# Altium PCB MB1455.PcbDoc (part 2 of 2)
Units mm, origin at the board's own origin, x right, y up, seen from the top; angles counter-clockwise.
Board outline 18.54 x 50.29 mm, 4 copper layers (Top Layer, Inner 1, Inner 2, Bottom Layer), stack 1.577 mm thick; 92 components, 84 nets, 350 pads, 195 vias.
Unrouted connection lines stored in the file: 7.
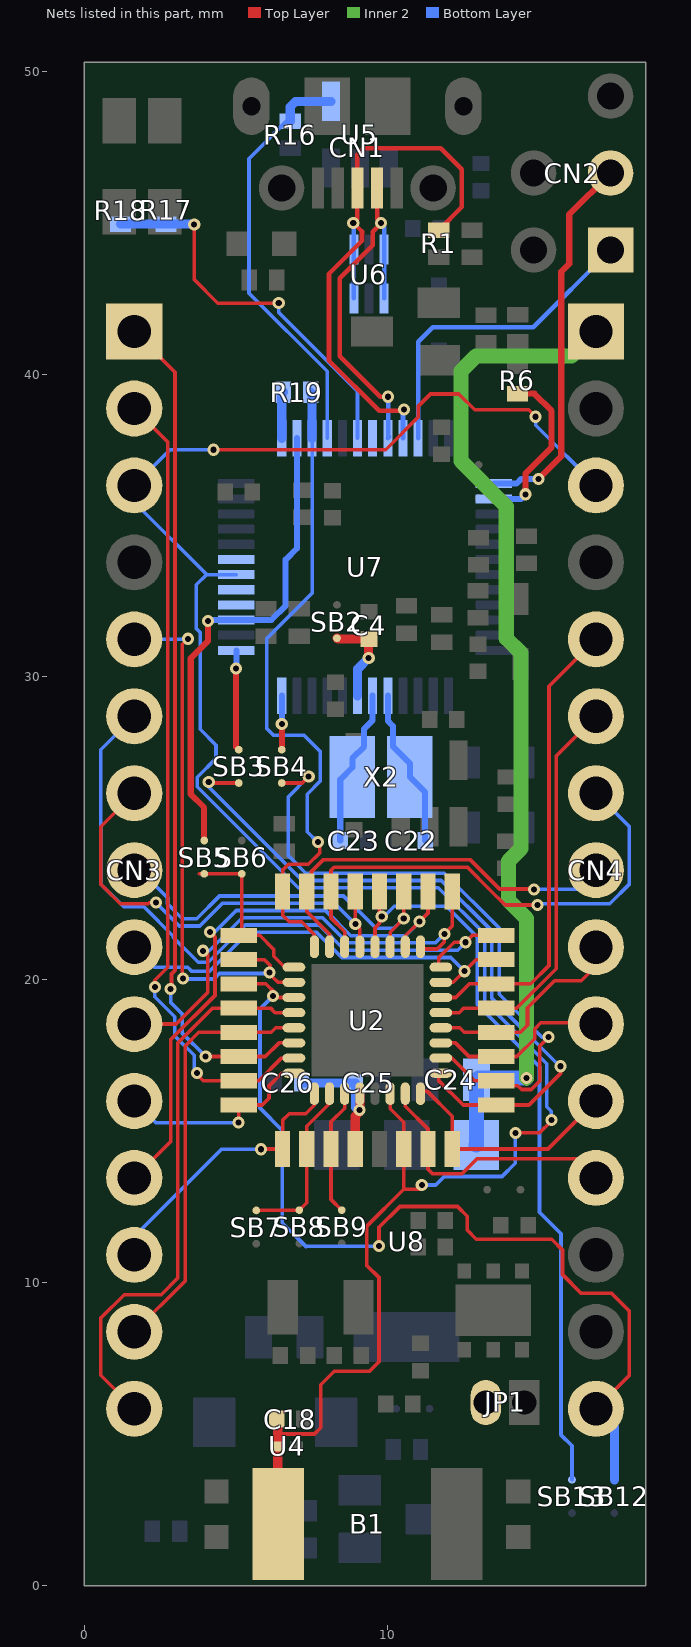
[diagram p4: the nets of this part, all layers, seen from the top]

## Via types
v1: diameter 0.4, hole 0.2, Top Layer to Bottom Layer, 195 vias

## Nets (pads, with @x,y where several pads share a name; then routed paths per layer and width w, separated by ;. In a path a pad name is that pad's centre, name@x,y a point inside that pad or via, vN(x,y) a via of type N, cw(c..) or ccw(c..) an arc to the next point about the centre after c; other vN are vias at no path point) (continued)
NetSB3_1: SB3.1 U2.9 | length 23.2
  Top Layer w0.12: v1(4.11,26.53) 4.14,26.5 SB3.1@5.1,26.5 ; U2.9@11.697,16.93 11.697,16.919 11.697,16.679 12.507,15.869 U2.9@13.597,15.869 14.679,15.869 15.72,16.91 v1(15.72,17.15)
  Bottom Layer w0.12: v1(4.11,26.53) 4.11,26.37 7.2,23.28 11.789,23.28 13.457,21.611 13.457,19.388 15.696,17.15 v1(15.72,17.15)
NetSB3_2: SB3.2 U7.13 | length 3.3
  Top Layer w0.2: v1(5.01,30.28) 5.01,27.69 SB3.2@5.1,27.6
  Bottom Layer w0.2: v1(5.01,30.28) 5.021,30.291 U7.13@5.021,30.88
NetSB4_1: SB4.1 U2.10 | length 21.7
  Top Layer w0.12: SB4.1@6.521,26.5 7.2,26.5 7.41,26.71 v1(7.41,26.72) ; U2.10@11.697,17.419 12.133,17.419 12.883,16.669 U2.10@13.597,16.669 13.756,16.51 14.313,16.51 14.443,16.38 14.757,16.38 15.04,16.663 15.04,17.82 v1(15.33,18.11)
  Bottom Layer w0.12: v1(7.41,26.72) 6.73,26.04 6.73,24.105 7.315,23.52 11.888,23.52 13.697,21.711 13.697,19.522 15.109,18.11 v1(15.33,18.11)
NetSB4_2: SB4.2 U7.12 | length 1.8
  Top Layer w0.2: SB4.2@6.521,27.6 v1(6.521,28.45) v1@6.521,28.49
  Bottom Layer w0.2: v1(6.521,28.45) U7.12@6.521,29.38
NetSB5_2: SB5.2 SB6.2 U2.25 | length 5.9
  Top Layer w0.12: 3.8,23.5 SB6.2@5.2,23.5 5.2,21.572 U2.25@5.097,21.469 5.796,21.469 6.26,21.005 6.26,20.78 6.621,20.419 U2.25@6.997,20.419
NetSB7_2: SB7.2 SB8.2 U2.2 | length 5.7
  Top Layer w0.12: SB7.2@5.68,12.39 5.69,12.4 SB8.2@7.1,12.4 7.347,12.647 U2.2@7.347,14.419 7.347,15.167 8.09,15.91 U2.2@8.09,16.31
NetSB9_2: SB9.2 U2.3 | length 4.3
  Top Layer w0.12: SB9.2@8.5,12.4 8.147,12.753 U2.3@8.147,14.419 8.147,15.314 8.597,15.764 U2.3@8.597,16.319
OSC_IN: C22.2 U7.5 X2.1 | length 5.3
  Bottom Layer w0.2: U7.5@10.021,29.38 10.021,28.549 10.19,28.38 10.19,27.71 10.75,27.15 X2.1@10.75,26.7 11.25,26.2 C22.2@11.25,24.6
OSC_OUT: C23.2 U7.6 X2.2 | length 5.2
  Bottom Layer w0.2: C23.2@8.45,24.6 8.45,26.61 8.85,27.01 8.85,27.31 9.24,27.7 9.24,28.289 9.521,28.57 U7.6@9.521,29.38
PA0: CN4.12 U2.7 | length 9
  Top Layer w0.12: U2.7@10.597,16.319 10.597,15.831 11.347,15.081 U2.7@11.347,14.419 11.347,13.746 11.493,13.6 12.47,13.6 12.96,14.09 16.263,14.09 CN4.12@16.891,13.462
PA1: CN4.11 U2.8 | length 7.9
  Top Layer w0.12: U2.8@11.097,16.319 11.33,16.319 12.147,15.501 U2.8@12.147,14.419 15.308,14.419 CN4.11@16.891,16.002
PA4: CN4.10 U2.11 | length 6
  Top Layer w0.12: U2.11@11.697,17.919 12.252,17.919 12.702,17.469 U2.11@13.597,17.469 14.279,17.469 14.87,18.06 14.87,18.38 15.071,18.581 16.852,18.581 CN4.10@16.891,18.542
PA5: CN4.9 U2.12 | length 7.1
  Top Layer w0.12: U2.12@11.697,18.419 12.394,18.419 12.544,18.269 U2.12@13.597,18.269 14.4,18.269 14.63,18.499 14.63,19.079 15.526,19.975 16.405,19.975 16.891,20.461 CN4.9@16.891,21.082
PA6: CN4.6 U2.13 | length 13.4
  Top Layer w0.12: U2.13@11.697,18.919 12.375,18.919 12.525,19.069 U2.13@13.597,19.069 14.281,19.069 15.58,20.368 15.58,27.391 CN4.6@16.891,28.702
PA7: CN4.5 U2.14 | length 15.5
  Top Layer w0.12: U2.14@11.697,19.419 12.268,19.419 12.718,19.869 U2.14@13.597,19.869 14.737,19.869 15.34,20.472 15.34,29.691 CN4.5@16.891,31.242
PA8: CN3.12 U2.18 | length 19.3
  Top Layer w0.12: CN3.12@1.651,13.462 2.85,14.661 2.85,18.019 4.317,19.487 4.317,21.413 v1(4.15,21.58) ; U2.18@10.597,21.019 U2.18@10.597,21.094 10.597,21.455 v1(11.071,21.929) 11.347,22.205 U2.18@11.347,22.919
  Bottom Layer w0.12: v1(4.15,21.58) 4.308,21.58 5.018,22.29 7.967,22.29 8.797,21.46 10.602,21.46 v1(11.071,21.929)
PA9: CN3.8 U2.19 | length 12.8
  Top Layer w0.12: U2.19@10.097,21.019 U2.19@10.097,21.094 10.097,21.574 v1(10.547,22.024) U2.19@10.547,22.919
  Bottom Layer w0.12: CN3.8@1.651,23.622 CN3.8@1.835,23.622 ; CN3.8@2.008,23.622 CN3.8@1.835,23.622 ; v1@10.53,22.01 10.22,21.7 9.632,21.7 8.562,22.77 4.463,22.77 3.713,22.02 3.239,22.02 2.75,22.509 2.75,22.707 CN3.8@1.835,23.622
PA10: CN3.7 U2.21 | length 15.1
  Top Layer w0.12: CN3.7@1.651,26.162 0.546,25.057 0.546,23.164 1.193,22.517 2.109,22.517 2.142,22.55 v1(2.37,22.55) v1@2.43,22.55 ; U2.21@8.947,22.919 v1(8.947,21.847) 9.097,21.697 U2.21@9.097,21.094 U2.21@9.097,21.019
  Bottom Layer w0.12: v1(2.37,22.55) 3.14,21.78 3.813,21.78 4.563,22.53 8.264,22.53 v1(8.947,21.847)
PA11: CN4.7 U2.22 | length 17
  Top Layer w0.12: U2.22@8.597,21.019 8.597,21.59 8.147,22.04 U2.22@8.147,22.919 8.147,23.62 8.247,23.72 12.65,23.72 13.391,22.98 ; 13.391,22.979 13.9,22.47 v1(14.96,22.47)
  Bottom Layer w0.12: v1(14.96,22.47) 14.96,22.5 14.977,22.517 17.349,22.517 17.996,23.164 17.996,25.057 CN4.7@16.891,26.162
PA12: CN4.8 U2.23 | length 13.1
  Top Layer w0.12: U2.23@8.097,21.019 8.097,21.507 7.347,22.257 U2.23@7.347,22.919 7.5,23.072 7.5,23.58 7.88,23.96 12.75,23.96 13.71,23 14.84,23 v1(14.85,22.99)
  Bottom Layer w0.12: v1(14.85,22.99) 16.259,22.99 CN4.8@16.891,23.622
PA15: CN3.5 U2.26 | length 18.4
  Top Layer w0.12: v1(3.26,20.04) 3.236,20.064 3.236,31.076 v1(3.42,31.26) ; U2.26@5.097,20.669 5.947,20.669 6.13,20.486 6.13,20.27 v1(6.11,20.25) ; v1@6.21,20.27 6.21,20.104 6.395,19.919 U2.26@6.997,19.919
  Bottom Layer w0.12: CN3.5@1.651,31.242 3.402,31.242 v1(3.42,31.26) ; v1(3.26,20.04) 3.27,20.03 4.28,20.03 4.46,20.21 6.07,20.21 v1(6.11,20.25)
PB0: CN3.9 U2.15 | length 14.5
  Top Layer w0.12: U2.15@11.697,19.919 12.185,19.919 v1(12.553,20.287) 12.935,20.669 U2.15@13.597,20.669
  Bottom Layer w0.12: CN3.9@1.651,21.082 2.313,20.42 3.417,20.42 3.557,20.28 4.129,20.28 5.419,21.57 7.669,21.57 8.499,20.74 12.1,20.74 v1(12.553,20.287)
PB1: CN3.6 U2.16 | length 22.6
  Top Layer w0.12: U2.16@11.697,20.419 11.697,20.728 12.211,21.242 v1(12.588,21.242) 12.815,21.469 U2.16@13.597,21.469
  Bottom Layer w0.12: CN3.6@1.651,28.702 0.546,27.597 0.546,23.164 1.3,22.41 1.97,22.41 2.94,21.44 2.94,21.403 3.763,20.58 4.089,20.58 5.319,21.81 7.768,21.81 8.598,20.98 12.326,20.98 v1(12.588,21.242)
PB2: CN3.10 U2.17 | length 15.9
  Top Layer w0.12: CN3.10@1.651,18.542 3.033,18.542 4.077,19.586 4.077,20.863 3.98,20.96 v1(3.92,20.96) ; U2.17@11.097,21.019 11.649,21.019 11.89,21.26 v1(11.89,21.52) 12.147,21.777 U2.17@12.147,22.919
  Bottom Layer w0.12: v1(3.92,20.96) 4.13,20.96 5.22,22.05 7.868,22.05 8.698,21.22 11.59,21.22 v1(11.89,21.52)
PB3: CN4.15 SB12.1 U2.27 | length 31.2
  Top Layer w0.12: U2.27@5.097,19.869 5.992,19.869 6.311,19.55 v1(6.23,19.47) ; 6.442,19.419 U2.27@6.922,19.419 U2.27@6.997,19.419 ; v1(9.73,11.21) 9.73,11.83 10.42,12.52 12.32,12.52 12.64,12.2 12.64,11.743 12.943,11.44 15.43,11.44 15.786,11.084 15.786,10.274 16.41,9.65 17.41,9.65 17.996,9.064 17.996,6.947 CN4.15@16.891,5.842
  Bottom Layer w0.12: v1@6.2,19.5 v1(6.23,19.47) 5.8,19.04 5.8,15.769 6.54,15.029 6.54,11.98 7.32,11.2 7.33,11.21 v1(9.73,11.21)
  Bottom Layer w0.3: CN4.15@16.891,5.842 17.5,5.233 SB12.1@17.5,3.5
PB4: CN3.15 U2.28 | length 18.8
  Top Layer w0.12: CN3.15@1.651,5.842 0.546,6.947 0.546,8.84 1.316,9.61 2.54,9.61 3.09,10.16 3.09,17.92 4.239,19.069 U2.28@5.097,19.069 6.15,19.069 6.3,18.919 U2.28@6.997,18.919
PB5: CN3.14 U2.29 | length 14
  Top Layer w0.12: CN3.14@1.651,8.382 3.33,10.061 3.33,17.821 3.778,18.269 U2.29@5.097,18.269 6.169,18.269 6.319,18.419 U2.29@6.997,18.419
PB6: CN3.1 U2.30 | length 28.2
  Top Layer w0.12: CN3.1@1.651,41.402 2.996,40.057 2.996,20.313 2.88,20.197 2.88,19.73 v1(2.85,19.7) ; v1(4.01,17.469) U2.30@5.097,17.469 5.976,17.469 6.426,17.919 U2.30@6.997,17.919
  Bottom Layer w0.12: v1(2.85,19.7) 2.85,19.259 3.23,18.879 3.23,18.249 v1(4.01,17.469)
PB7: CN3.2 U2.31 | length 26.9
  Top Layer w0.12: CN3.2@1.651,38.862 2.756,37.757 2.756,20.413 2.33,19.987 v1(2.33,19.76) ; v1(3.72,16.93) 3.72,16.88 3.931,16.669 U2.31@5.097,16.669 5.759,16.669 6.509,17.419 U2.31@6.997,17.419
  Bottom Layer w0.12: v1(2.33,19.76) 2.33,19.44 2.99,18.78 2.99,18.15 3.63,17.51 3.63,17.02 v1(3.72,16.93)
PB8: CN3.11 U2.32 | length 6.9
  Top Layer w0.12: v1(5.097,15.287) U2.32@5.097,15.869 5.879,15.869 6.1,16.09 6.1,16.5 6.519,16.919 U2.32@6.997,16.919
  Bottom Layer w0.12: CN3.11@1.651,16.002 2.366,15.287 v1(5.097,15.287)
PB9: CN3.13 U2.1 | length 9.4
  Top Layer w0.12: v1(5.831,14.41) 5.84,14.419 U2.1@6.547,14.419 6.547,15.363 6.766,15.582 7.316,15.582 7.597,15.863 U2.1@7.597,16.319
  Bottom Layer w0.12: CN3.13@1.651,10.922 1.651,11.531 4.53,14.41 v1(5.831,14.41)
PC6: SB13.1 U2.20 | length 25.1
  Top Layer w0.12: U2.20@9.597,21.019 9.597,21.716 9.747,21.866 v1@9.747,22.03 ; U2.20@9.747,22.919 v1@9.747,22.03 ; v1(9.82,22.09) 9.76,22.03 v1@9.747,22.03
  Bottom Layer w0.12: v1(9.82,22.09) 9.82,22.02 10.23,22.43 11.96,22.43 12.977,21.413 12.977,19.189 15.03,17.137 15.03,12.33 15.74,11.62 15.74,4.98 16.1,4.62 SB13.1@16.1,3.5
PWR_ENn: R16.1 U5.4 U7.28 | length 14.1
  Bottom Layer w0.12: R16.1@6.8,48.35 6.68,48.35 5.44,47.11 5.44,42.67 8.021,40.089 U7.28@8.021,37.88
  Bottom Layer w0.3: R16.1@6.8,48.35 6.8,48.82 6.98,49 U5.4@8.15,49
STLK_LED: R17.1 R18.1 U7.30 | length 12.9
  Top Layer w0.12: v1(3.63,44.94) 3.63,43.12 4.41,42.34 v1(6.42,42.34)
  Bottom Layer w0.12: v1(6.42,42.34) 6.42,42.029 9.021,39.428 U7.30@9.021,37.88
  Bottom Layer w0.3: R18.1@1.2,44.95 R17.1@2.7,44.95 3.62,44.95 v1(3.63,44.94)
STLK_RST: C4.2 SB2.2 U7.7 | length 3.1
  Top Layer w0.3: SB2.2@8.343,31.28 8.372,31.25 C4.2@9.4,31.25 9.39,31.24 v1(9.39,30.63)
  Bottom Layer w0.3: U7.7@9.021,29.38 9.021,30.261 v1(9.39,30.63)
STLK_SWCLK: CN2.3 U7.37 | length 12.6
  Top Layer w0.2: v1(15,36.54) 15.746,37.286 15.746,43.376 16.01,43.64 16.01,45.271 CN2.3@17.374,46.634
  Bottom Layer w0.2: U7.37@13.521,36.38 14.27,36.38 14.43,36.54 v1(15,36.54)
STLK_SWDIO: CN2.1 U7.34 | length 10.8
  Bottom Layer w0.15: U7.34@11.021,37.88 11.021,41.061 11.5,41.54 14.819,41.54 CN2.1@17.374,44.094
STLK_USB_D_N: CN1.2 U6.1 U6.6 U7.32 | length 12
  Top Layer w0.152: CN1.2@9.667,46.142 9.667,45.103 v1@9.75,45.02 ; v1@9.78,44.953 9.52,44.692 9.52,44.254 8.432,43.167 8.432,40.586 9.768,39.25 v1(10.03,39.25)
  Bottom Layer w0.152: U6.1@9.9,42.495 U6.6@9.9,44.105 v1@9.9,44.85 ; U7.32@10.021,37.88 10.07,37.929 10.03,37.969 v1(10.03,39.25)
  other v1: 9.8,44.99
STLK_USB_D_P: CN1.3 R1.1 U6.3 U6.4 U7.33 | length 20.2
  Top Layer w0.152: v1(8.88,44.99) v1@8.904,44.99 ; v1@8.92,44.953 9.168,44.705 9.168,44.4 8.08,43.312 8.08,40.44 9.732,38.788 10.495,38.788 v1@10.547,38.84 ; v1@8.92,44.99 v1@8.904,44.99 ; v1@10.547,38.83 v1(10.55,38.83) ; R1.1@11.7,44.75 12.464,45.514 12.464,46.755 11.763,47.456 9.23,47.456 9.017,47.243 CN1.3@9.017,46.142 9.017,45.103 v1@8.904,44.99
  Bottom Layer w0.152: v1(8.88,44.99) 8.89,44.99 8.9,44.98 U6.4@8.9,44.105 U6.3@8.9,42.495 ; U7.33@10.521,37.88 10.521,38.83 v1(10.55,38.83)
T_JRST: U7.19
T_JTCK: SB5.1 U7.15 U7.26 | length 16.1
  Top Layer w0.2: SB5.1@3.96,24.6 3.96,25.69 3.516,26.134 3.516,30.616 4.08,31.18 v1(4.08,31.85)
  Bottom Layer w0.2: v1(4.08,31.85) 4.11,31.88 U7.15@5.021,31.88 6.18,31.88 6.65,32.35 6.65,33.87 7.021,34.241 U7.26@7.021,37.88
T_JTDI: U7.17
T_JTDO: U7.16
T_JTMS: R19.2 U2.24 U7.27 | length 22.3
  Top Layer w0.12: U2.24@7.597,21.019 7.597,21.497 7.178,21.916 6.768,21.916 6.547,22.137 U2.24@6.547,22.919 6.547,23.617 6.745,23.815 7.396,23.815 7.77,24.189 7.77,24.52 7.74,24.55 v1(7.72,24.55)
  Bottom Layer w0.12: U7.27@7.521,37.88 7.521,32.761 6.02,31.26 6.02,28.31 6.26,28.07 7.259,28.07 7.79,27.539 7.79,26.563 7.36,26.133 7.36,24.89 7.7,24.55 v1(7.72,24.55)
  Bottom Layer w0.3: R19.2@7.471,39.4 7.521,39.35 U7.27@7.521,37.88
T_NRST: B1.1 C18.2 CN3.3 CN4.3 U2.6 U4.1 U7.18 | length 74.2
  Top Layer w0.12: v1(4.27,37.5) 9.95,37.5 11.02,38.57 11.02,38.93 11.43,39.34 12.367,39.34 12.887,38.82 14.67,38.82 v1(14.9,38.59) ; 6.388,5.01 7.6,5.01 7.81,5.22 7.81,6.64 8.25,7.08 9.42,7.08 9.73,7.39 9.73,10.175 9.32,10.585 9.32,11.863 10.547,13.09 ; U2.6@10.097,16.319 U2.6@10.097,16.244 10.097,15.748 10.547,15.298 U2.6@10.547,14.419 10.547,13.09 ; v1(11.143,13.229) 11.143,13.153 11.08,13.09 10.547,13.09 ; v1(14.23,14.95) 15.032,14.95 15.42,15.338 v1(15.42,15.37)
  Top Layer w0.3: C18.2@6.35,5.5 6.388,5.462 6.388,5.01 U4.1@6.388,4.6 6.388,2.042 B1.1@6.397,2.032
  Bottom Layer w0.12: v1(4.27,37.5) 2.829,37.5 CN3.3@1.651,36.322 1.651,35.769 4.04,33.38 ; U7.18@5.021,33.38 4.04,33.38 ; v1(11.143,13.229) 11.599,13.229 11.88,13.51 13.79,13.51 14.23,13.95 v1(14.23,14.95) ; v1(14.9,38.59) 14.9,38.313 CN4.3@16.891,36.322 ; v1(15.42,15.37) 15.42,15.66 15.27,15.81 15.27,17.236 13.217,19.289 13.217,21.512 11.689,23.04 7.063,23.04 3.73,26.373 3.73,26.687 4.35,27.307 4.35,27.75 3.83,28.27 3.83,31.47 3.7,31.6 3.7,33.039 4.04,33.38
T_SWDIO_IN: R19.1 U7.25 | length 1.5
  Bottom Layer w0.3: U7.25@6.521,37.88 6.521,39.35 R19.1@6.571,39.4
T_SWO: U7.31
USB_RENUMn: R6.2 U7.38 | length 5.6
  Top Layer w0.2: R6.2@14.3,39.35 14.86,39.35 15.426,38.784 15.426,37.576 14.57,36.72 v1(14.57,36.03)
  Bottom Layer w0.2: U7.38@13.521,35.88 14.42,35.88 v1(14.57,36.03)
VDD: C25.2 C26.2 JP1.2 U2.4 | length 4.7
  Top Layer w0.3: U2.4@8.947,14.419 8.947,15.499 9.097,15.649 U2.4@9.097,16.319
  Bottom Layer w0.3: C26.2@7.172,16.6 C25.2@8.95,16.6 8.95,15.79 9.04,15.7 v1(9.09,15.7)
VIN: C24.2 CN4.1 U8.3 | length 33.4
  Inner 2 w0.5: v1(14.6,16.76) 14.6,22.024 14,22.624 14,23.92 14.42,24.34 14.42,30.79 13.93,31.28 13.93,35.63 12.434,37.126 12.434,40.1 12.934,40.6 16.089,40.6 CN4.1@16.891,41.402
  Bottom Layer w0.5: U8.3@12.943,14.554 12.95,14.562 C24.2@12.95,16.7 13.01,16.76 v1(14.6,16.76)
pads on no net: CN2.5 U3.3 U3.5 U7.4 U7.11 U7.14 U7.21 U7.22 U7.40 U7.41 U7.42 U7.43 U7.45 U7.46

## Polygon pours and split planes (outlines as drawn)
3V3 on Inner 2 "3V3_L03_P010" (solid, remove dead copper, pour order 10): 4.945,22.875 4.945,20.145 3.79,18.99 3.79,7.12 4.39,6.52 5.1,6.52 5.19,6.43 5.17,6.41 5.17,4.63 4.35,3.81 1.73,3.81 1.39,3.47 1.39,2.15 1.91,1.63 7.15,1.63 8.9,3.38 8.9,6.35 11.35,6.35 11.35,4.72 12.14,3.93 13.599,3.93 14.03,4.361 13.85,4.541 13.85,8.96 11.72,11.09 11.72,13.115 11.745,13.115 11.94,13.31 19.55,13.31 19.65,13.21 19.65,-0.37 18.87,-1.15 -0.59,-1.15 -1.64,-0.1 -1.64,34.12 -0.81,34.95 6.357,34.95 7.33,33.977 7.33,25.259
E5V on Inner 2 "E5V_L03_P004" (solid, remove dead copper, pour order 4): 5.105,22.855 5.105,20.084 3.87,18.85 3.87,7.04 4.29,6.62 5.19,6.62 5.63,7.06 5.63,17.07 7.717,19.157 7.717,19.16 14.31,19.16 14.307,28.527 13.86,28.975 13.655,29.18 13.13,29.18 13.035,29.085 9.31,25.36 7.61,25.36
3V3_STLK on Inner 2 "3V3_STLK_L03_P000" (solid, remove dead copper, pour order 0): 12.17,36.857 12.17,40.35 12.76,40.94 19.06,40.94 19.46,41.34 19.36,41.44 19.36,51.15 19.03,51.48 0.635,51.48 0.265,51.11 0.285,51.09 0.285,35.09 6.335,35.09 7.405,34.02 7.405,25.73 7.735,25.4 9.135,25.4 13.865,30.13 13.865,35.178
VDD on Inner 2 "VDD_L03_P002" (solid, remove dead copper, pour order 2): 8.93,10.39 8.93,6.56 9.04,6.45 11.39,6.45 11.46,6.38 11.46,4.9 12.3,4.06 13.56,4.06 13.8,4.3 13.8,8.83 11.72,10.91 11.72,15.32 10.77,16.27 8.75,16.27 8.33,15.85 8.33,10.99
5V on Inner 2 "5V_L03_P008" (solid, remove dead copper, pour order 8): 18.78,13.44 11.8,13.44 11.8,15.422 10.82,16.41 8.69,16.41 8.2,15.92 8.2,10.94 8.78,10.36 8.78,3.44 7.1,1.76 1.97,1.76 1.52,2.21 1.52,3.39 1.81,3.68 4.37,3.68 5.19,4.5 5.19,6.43 5.76,7 5.768,16.89 5.768,16.988 7.81,19.03 11.8,19.03 14.84,19.03 14.84,30.91 14.26,31.49 14.26,35.8 12.77,37.29 12.77,39.9 13.08,40.21 19,40.21 19.15,40.06 19.15,15.19 19.15,13.81
GND on Inner 1 "GND_L02_P012" (solid, remove dead copper, pour order 12): -1.95,53.4 20.79,53.4 23.21,50.98 23.21,0.57 18.9,-3.74 -1.06,-3.74 -6.98,2.18 -6.98,51.84 -5.55,53.27
GND on Bottom Layer "GND_L04_P014" (solid, remove dead copper, pour order 14): -3.62,54.23 22.32,54.23 23.93,52.62 23.93,-1.1 20.54,-4.49 -3.9,-4.49 -5.35,-3.04 -5.35,51.45
GND on Top Layer "GND_L01_P016" (solid, remove dead copper, pour order 16): -2.23,54.12 19.2,54.12 22.43,50.89 22.43,1.97 17.41,-3.05 -6.57,-3.05 -6.57,51.73 -4.96,53.34

## Keep-outs
Keep-Out Layer:
  the board outline again, w0.1

## Other copper
Top Layer:
  text ".Layer_Name" at -22.785,-18.354 h3
  text ".GTL" at 18.91,-18.354 h3
Inner 1:
  text ".Layer_Name" at -22.785,-18.354 h3
  text ".G1" at 18.91,-18.354 h3
Inner 2:
  text ".Layer_Name" at -22.785,-18.354 h3
  text ".G2" at 18.91,-18.354 h3
Bottom Layer:
  text ".GBL" at 7.706,-18.386 h3
  text ".Layer_Name" at 49.02,-18.386 h3

## Silkscreen, mask and mechanical layers (free items; w line width, h text height)
Top Overlay:
  circle w0.203: c0.3,41.387 r0.072
  circle w0.203: c18.2,41.451 r0.072
  text "STLK" at 13.45,48.9 h1.02
  text "CN3" at 0.8,42.6 h1.02
  text "CN4" at 15.995,42.5 h1.02
  text "D1" at 2.8,42.4 h1.02 r270
  text "VIN" at 15.1,42.086 h1.02 r270
  text "GND" at 15.159,39.889 h1.02 r270
  text "D0" at 2.8,39.381 h1.02 r270
  text "MB1455C" at 4.1,37.9 h0.91
  text "RST" at 2.8,37.18 h1.02 r270
  text "RST" at 15.1,37.075 h1.02 r270
  text "GND" at 2.8,34.6 h1.02 r270
  text "5V" at 15.209,34.3 h1.02 r270
  text "A7" at 15.225,31.9 h1.02 r270
  text "D2" at 2.8,31.7 h1.02 r270
  text "D3" at 2.8,29.3 h1.02 r270
  text "A6" at 15.159,29.3 h1.02 r270
  text "A5" at 15.159,26.725 h1.02 r270
  text "D4" at 2.8,26.7 h1.02 r270
  text "D5" at 2.4,25.319 h1.02 r270
  text "A4" at 15.159,24.3 h1.02 r270
  text "D6" at 2.8,21.6 h1.02 r270
  text "A3" at 15.159,21.6 h1.02 r270
  text "A2" at 15.2,19.1 h1.02 r270
  text "D7" at 2.8,19 h1.02 r270
  text "A1" at 15.209,16.6 h1.02 r270
  text "D8" at 2.8,16.5 h1.02 r270
  text "A0" at 15.24,14.79 h1.02 r270
  text "D9" at 2.8,13.9 h1.02 r270
  text "D10" at 2.8,11.8 h1.02 r270
  text "REF" at 15.21,11.71 h1.02 r270
  text "3V3" at 15.209,9.2 h1.02 r270
  text "D11" at 2.8,9.1 h1.02 r270
  text "D13" at 15.2,6.6 h1.02 r270
  text "D12" at 2.8,6.5 h1.02 r270
  text ".Layer_Name" at -22.785,-18.354 h3
  text ".GTO" at 18.91,-18.354 h3
Bottom Overlay:
  lines w0.1: 9,18 15,18 15,23 9,23 9,18
  text "IDD" at 14.63,8.01 h1.02
  text ".GBO" at 7.706,-18.386 h3
  text ".Layer_Name" at 49.02,-18.386 h3
Top Paste:
  text ".Layer_Name" at -22.785,-18.354 h3
  text ".GTP" at 18.91,-18.354 h3
Bottom Paste:
  text ".GBP" at 7.706,-18.386 h3
  text ".Layer_Name" at 49.02,-18.386 h3
Top Solder:
  text ".Layer_Name" at -22.785,-18.354 h3
  text ".GTS" at 18.91,-18.354 h3
Bottom Solder:
  text ".GBS" at 7.706,-18.386 h3
  text ".Layer_Name" at 49.02,-18.386 h3
M1-Board Shape:
  the board outline again, w0.1
M2-Board Dimensions:
  text ".Layer_Name" at -22.785,-18.354 h3
  text ".GM2" at 18.91,-18.354 h3
M14-Top Assembly:
  text ".Layer_Name" at -22.785,-18.354 h3
  text ".GM14" at 18.91,-18.354 h3
M15-Bottom Assembly:
  text ".GM15" at 7.706,-18.386 h3
  text ".Layer_Name" at 49.02,-18.386 h3
Drill Drawing:
  drawing of 477 lines, arcs and shapes, not listed
  text "PCB SPECIFICATIONS :" at -5.928,99.978 h3
  text "PCB : TYPE 3" at 141.563,99.806 h3
  text "A.   MATERIAL :" at -5.928,95.978 h3
  text "FR-4" at 32.571,95.978 h3
  text "TG-170" at 49.071,95.978 h3
  text "X  TG-150" at 67.321,95.978 h3
  text "TG-140" at 83.321,95.978 h3
  text "ASPECT-RATIO, AXE Z :" at 141.563,94.306 h3
  text "B.   MATERIAL FAMILY :" at -5.928,92.978 h3
  text "N/A" at 32.571,92.978 h3
  text "C.   SOLDERMASK COLOR :" at -5.928,89.978 h3
  text "GREEN" at 32.571,89.978 h3
  text "X  WHITE" at 49.071,89.978 h3
  text "RED" at 67.321,89.978 h3
  text "BLACK" at 83.321,89.978 h3
  text "6:1 to 8:1 / LEVEL \"B\"" at 141.582,87.559 h3
  text "D.   SILKSCREEN COLOR :" at -5.928,86.978 h3
  text "WHITE" at 32.571,86.978 h3
  text "YELLOW" at 49.071,86.978 h3
  text "BLACK" at 67.321,86.978 h3
  text "X  Blue ink PANTONE 2955" at 83.321,86.978 h3
  text "E.   SURFACE FINISH :" at -5.928,83.978 h3
  text "X  ENIG" at 32.571,83.978 h3
  text "IMMERSION SILVER" at 49.071,83.978 h3
  text "IMMERSION TIN" at 83.321,83.978 h3
  text "MINIMUM PARAMETERS" at 141.609,81.958 h3
  text "HASL" at 32.571,80.978 h3
  text "HASL (PB-FREE)" at 49.071,80.978 h3
  text "GOLDEN FINGER" at 83.321,80.978 h3
  text "F.   IMPEDANCE CONTROL :" at -5.928,77.978 h3
  text "NO" at 32.571,77.978 h3
  text "X  YES  (SEE IMPEDANCE TABLE FOR DETAIL INFORMATION)" at 49.071,77.978 h3
  text "DEFAULT" at 141.609,76.458 h3
  text "G.   THROUGH VIA :" at -5.928,74.978 h3
  text "PLUG THE VIAS WHICH ARE COVERED WITH SOLDERMASK ONE OR TWO SIDE." at 32.571,74.978 h3
  text "PLUG MATERIAL :" at 32.571,71.978 h3
  text "X  SOLDERMASK" at 58.071,71.978 h3
  text "NON-CONDUCTIVE EPOXY." at 83.321,71.978 h3
  text "TRACKS : 0.127mm           / GAPS : 0.127mm" at 141.609,70.708 h3
  text "H.   STACK-UP :" at -5.928,68.978 h3
  text "SEE LAYER STACK-UP SEQUENCE FOR OVERALL THICKNESS." at 32.571,68.978 h3
  text "Layer" at 24.145,62.694 h1.52
  text "Name" at 34.556,62.694 h1.52
  text "Material" at 58.172,62.694 h1.52
  text "Thickness" at 80.01,62.694 h1.52
  text "Constant" at 96.516,62.694 h1.52
  text "Board Layer Stack" at 110.99,62.694 h1.52
  text "IMPEDANCE TABLE   USB FS STLINK" at 141.17,61.924 h3
  text "1" at 24.145,59.646 h1.52
  text "Top Overlay" at 34.556,59.646 h1.52
  text "LAYER" at 145.42,56.924 h3
  text "TRACE" at 161.67,56.924 h3
  text "SPACING" at 172.17,56.924 h3
  text "IMPEDANCE" at 185.67,56.924 h3
  text "IMPEDANCE" at 202.67,56.924 h3
  text "TOL." at 221.42,56.924 h3
  text "2" at 24.145,56.598 h1.52
  text "Top Solder" at 34.556,56.598 h1.52
  text "Solder Resist" at 58.172,56.598 h1.52
  text "0.015mm" at 80.01,56.598 h1.52
  text "3.5" at 96.516,56.598 h1.52
  text "(mm)" at 175.495,54.449 h2.5
  text "(mm)" at 163.67,54.399 h2.5
  text "(Single ended)" at 186.17,54.174 h2.5
  text "(Differential)" at 203.92,54.174 h2.5
  text "3" at 24.145,53.55 h1.52
  text "Top Layer" at 34.556,53.55 h1.52
  text "Copper" at 58.172,53.55 h1.52
  text "0.035mm" at 80.01,53.55 h1.52
  text "+/- 15%" at 220.475,50.534 h3
  text "4" at 24.145,50.502 h1.52
  text "Dielectric 1" at 34.556,50.502 h1.52
  text "FR-4" at 58.172,50.502 h1.52
  text "0.254mm" at 80.01,50.502 h1.52
  text "4.2" at 96.516,50.502 h1.52
  text "0.155" at 162.645,50.449 h3
  text "TOP" at 141.65,50.409 h3
  text "0.226" at 174.67,50.424 h3
  text "n/a" at 189.025,50.359 h3
  text "90 ohm" at 205.111,50.183 h3
  text "5" at 24.145,47.454 h1.52
  text "Inner 1" at 34.556,47.454 h1.52
  text "Copper" at 58.172,47.454 h1.52
  text "0.036mm" at 80.01,47.454 h1.52
  text "+/- 15%" at 220.48,47.019 h3
  text "0.130" at 162.65,46.934 h3
  text "0.251" at 174.675,46.909 h3
  text "LAYER 1" at 143.595,46.874 h3
  text "90 ohm" at 205.111,46.881 h3
  text "n/a" at 189.03,46.844 h3
  text "6" at 24.145,44.406 h1.52
  text "Dielectric 3" at 34.556,44.406 h1.52
  text "0.927mm" at 80.01,44.406 h1.52
  text "4.2" at 96.516,44.406 h1.52
  text "7" at 24.145,41.358 h1.52
  text "Inner 2" at 34.556,41.358 h1.52
  text "Copper" at 58.172,41.358 h1.52
  text "0.036mm" at 80.01,41.358 h1.52
  text "8" at 24.145,38.31 h1.52
  text "Dielectric 2" at 34.556,38.31 h1.52
  text "0.254mm" at 80.01,38.31 h1.52
  text "4.2" at 96.516,38.31 h1.52
  text "9" at 24.145,35.262 h1.52
  text "Bottom Layer" at 34.556,35.262 h1.52
  text "Copper" at 58.172,35.262 h1.52
  text "0.035mm" at 80.01,35.262 h1.52
  text "10" at 24.145,32.214 h1.52
  text "Bottom Solder" at 34.556,32.214 h1.52
  text "Solder Resist" at 58.172,32.214 h1.52
  text "0.015mm" at 80.01,32.214 h1.52
  text "3.5" at 96.516,32.214 h1.52
  text "11" at 24.145,29.166 h1.52
  text "Bottom Overlay" at 34.556,29.166 h1.52
  text "Symbol" at 24.817,23.749 h2.16
  text "Count" at 33.279,23.749 h2.16
  text "Hole Size" at 42.078,23.749 h2.16
  text "Plated" at 57.628,23.749 h2.16
  text "Hole Type" at 65.056,23.749 h2.16
  text "Drill Layer Pair" at 75.871,23.749 h2.16
  text "Via/Pad" at 96.37,23.749 h2.16
  text "Pad Shape" at 105.231,23.749 h2.16
  text "Template" at 116.807,23.749 h2.16
  text "Description" at 142.805,23.749 h2.16
  text "Hole Tolerance (+)" at 154.431,23.749 h2.16
  text "Hole Tolerance (-)" at 172.51,23.749 h2.16
  text "Hole Length" at 190.103,23.749 h2.16
  text "Routed Path Length" at 205.545,23.749 h2.16
  text "2" at 33.279,20.02 h1.8
  text "0.60mm (23.62mil)" at 42.078,20.02 h1.8
  text "PTH" at 57.628,20.02 h1.8
  text "Slot" at 65.056,20.02 h1.8
  text "Top Layer - Bottom Layer" at 75.871,20.02 h1.8
  text "Pad" at 96.37,20.02 h1.8
  text "Rounded" at 105.231,20.02 h1.8
  text "r190_120h60_130r100m195_125" at 116.807,20.02 h1.8
  text "1.30mm (51.18mil)" at 190.103,20.02 h1.8
  text "0.70mm (27.56mil)" at 205.545,20.02 h1.8
  text "2" at 33.279,16.292 h1.8
  text "0.80mm (31.50mil)" at 42.078,16.292 h1.8
  text "PTH" at 57.628,16.292 h1.8
  text "Round" at 65.056,16.292 h1.8
  text "Top Layer - Bottom Layer" at 75.871,16.292 h1.8
  text "Pad" at 96.37,16.292 h1.8
  text "(Mixed)" at 105.231,16.292 h1.8
  text "(Mixed)" at 116.807,16.292 h1.8
  text "-" at 190.103,16.292 h1.8
  text "-" at 205.545,16.292 h1.8
  text "7" at 33.279,12.564 h1.8
  text "0.90mm (35.43mil)" at 42.078,12.564 h1.8
  text "PTH" at 57.628,12.564 h1.8
  text "Round" at 65.056,12.564 h1.8
  text "Top Layer - Bottom Layer" at 75.871,12.564 h1.8
  text "Pad" at 96.37,12.564 h1.8
  text "(Mixed)" at 105.231,12.564 h1.8
  text "(Mixed)" at 116.807,12.564 h1.8
  text "-" at 190.103,12.564 h1.8
  text "-" at 205.545,12.564 h1.8
  text "30" at 33.279,8.836 h1.8
  text "1.10mm (43.31mil)" at 42.078,8.836 h1.8
  text "PTH" at 57.628,8.836 h1.8
  text "Round" at 65.056,8.836 h1.8
  text "Top Layer - Bottom Layer" at 75.871,8.836 h1.8
  text "Pad" at 96.37,8.836 h1.8
  text "Rounded" at 105.231,8.836 h1.8
  text "(Mixed)" at 116.807,8.836 h1.8
  text "-" at 190.103,8.836 h1.8
  text "-" at 205.545,8.836 h1.8
  text "195" at 33.279,5.107 h1.8
  text "0.20mm (7.87mil)" at 42.078,5.107 h1.8
  text "PTH" at 57.628,5.107 h1.8
  text "Round" at 65.056,5.107 h1.8
  text "Top Layer - Bottom Layer" at 75.871,5.107 h1.8
  text "Via" at 96.37,5.107 h1.8
  text "Rounded" at 105.231,5.107 h1.8
  text "v40h20" at 116.807,5.107 h1.8
  text "-" at 190.103,5.107 h1.8
  text "-" at 205.545,5.107 h1.8
  text "236 Total" at 33.279,1.379 h1.8
  text "Slot definitions :" at 24.817,-1.23 h1.8
  text "Routed Path Length" at 37.103,-1.23 h1.8
  text "= Calculated from tool start centre position to tool end centre position." at 52.323,-1.23 h1.8
  text "Hole Length" at 37.103,-2.722 h1.8
  text "= Routed Path Length + Tool Size = Slot length as defined in the PCB layout" at 46.673,-2.722 h1.8
  text ".Layer_Name" at -22.785,-18.354 h3
  text ".DRL" at 18.91,-18.354 h3
M20-Top Title Box:
  circle w0.254: c55.219,-25.074 r1.3
  region: 40.741,-26.167 29.985,-26.167 30.978,-23.675 38.836,-23.675 39.285,-22.915 41.493,-25.464
  region: 54.744,-17.838 39.217,-17.838 38.523,-19.613 37.312,-20.838 35.915,-18.978 35.915,-17.327 37.058,-15.93 38.494,-15.552 54.744,-15.552
  lines w0.254: 30.978,-23.675 39.77,-23.675 36.704,-20.137 cw(c38.508,-18.193) 38.748,-15.552 55.512,-15.552 54.75,-17.838 ; 34.292,-15.305 cw(c36.718,-16.275) 36.955,-13.673 ; 34.331,-15.272 29.985,-26.167 49.308,-26.167 ccw(c49.556,-23.433) 52.106,-24.453 ; 36.071,-19.207 41.493,-25.464 ; 36.325,-19.207 41.63,-25.328 ; 36.325,-18.953 41.63,-25.074 ; 36.423,-17.838 49.416,-17.838 ; 36.452,-18.826 41.757,-24.947 ; 36.579,-18.699 41.884,-24.82 ; 36.706,-18.572 42.011,-24.693 ; 36.833,-18.445 42.138,-24.566 ; 36.888,-16.493 42.193,-22.614 ; 36.956,-13.673 56.406,-13.673 52.106,-24.45 ; 36.96,-18.318 42.211,-24.376 ; 36.96,-18.064 42.265,-24.185 ; 36.96,-17.81 42.265,-23.931 ; 36.96,-16.921 42.265,-23.042 ; 37.087,-17.683 42.392,-23.804 ; 37.087,-17.302 42.392,-23.423 ; 38.459,-23.688 ccw(c38.564,-23.153) 38.861,-22.696 ; 39.545,-17.824 ccw(c39.519,-18.392) 39.189,-18.854 41.554,-21.583 cw(c39.75,-23.526) 40.483,-26.075 ; 45.827,-25.963 48.716,-17.584 ; 46.049,-25.913 48.918,-17.593 ; 46.176,-25.913 49.045,-17.593 ; 46.43,-25.913 49.299,-17.593 ; 46.684,-25.913 49.553,-17.593 ; 46.938,-25.913 49.807,-17.593 ; 47.192,-25.913 50.061,-17.593 ; 47.446,-25.913 50.315,-17.593 ; 47.7,-25.913 50.569,-17.593 ; 47.954,-25.913 50.823,-17.593 ; 48.162,-25.963 51.052,-17.584 ; 51.052,-17.838 54.744,-17.838 ; 54.076,-17.835 54.838,-15.549 ; 54.242,-17.838 55.004,-15.552 ; 54.496,-17.838 55.258,-15.552
  lines w0.3: -31.785,-25.054 28.215,-25.054 ; -31.785,-20.054 28.215,-20.054 ; -31.785,-15.054 28.215,-15.054 ; 8.215,-30.054 8.215,-15.054 ; 28.215,-30.054 28.215,-10.054 ; 45.827,-25.963 48.162,-25.963 ; -31.785,-30.054 58.215,-30.054 58.215,-10.054 -31.785,-10.054 -31.785,-30.054
  text "Project: '.Board_Name'" at -30.785,-13.27 h3
  text "Layer:" at -30.785,-18.354 h3
  text "Gerber:" at 9.204,-18.354 h3
  text "Variant: '.VariantName'" at -30.785,-23.354 h3
  text "Ref: '.Board_Reference'" at 9.331,-23.354 h3
  text "R" at 54.711,-25.836 h1.52
  text "Date: '.Board_Document_Date'" at -30.785,-28.354 h3
  text "Rev: '.Board_PCB_Revision'" at 9.274,-28.354 h3
M21-Bottom Title Box:
  circle w0.254: c-28.602,-25.074 r1.3
  region: -28.128,-17.838 -12.6,-17.838 -11.906,-19.613 -10.695,-20.838 -9.298,-18.978 -9.298,-17.327 -10.441,-15.93 -11.877,-15.552 -28.128,-15.552
  region: -14.124,-26.167 -3.368,-26.167 -4.362,-23.675 -12.219,-23.675 -12.668,-22.915 -14.877,-25.464
  lines w0.254: -28.641,-15.552 -27.879,-17.838 ; -28.387,-15.552 -27.625,-17.838 ; -28.221,-15.549 -27.459,-17.835 ; -28.133,-17.838 -28.895,-15.552 -12.131,-15.552 cw(c-11.891,-18.193) -10.088,-20.137 -13.154,-23.675 -4.362,-23.675 ; -28.128,-17.838 -24.435,-17.838 ; -25.489,-24.453 ccw(c-22.94,-23.433) -22.691,-26.167 -3.368,-26.167 -7.715,-15.272 ; -25.49,-24.45 -29.789,-13.673 -10.34,-13.673 ; -24.435,-17.584 -21.546,-25.963 ; -24.207,-17.593 -21.337,-25.913 ; -23.953,-17.593 -21.083,-25.913 ; -23.699,-17.593 -20.829,-25.913 ; -23.445,-17.593 -20.575,-25.913 ; -23.191,-17.593 -20.321,-25.913 ; -22.937,-17.593 -20.067,-25.913 ; -22.799,-17.838 -9.806,-17.838 ; -22.683,-17.593 -19.813,-25.913 ; -22.429,-17.593 -19.559,-25.913 ; -22.302,-17.593 -19.432,-25.913 ; -22.099,-17.584 -19.21,-25.963 ; -15.775,-23.804 -10.47,-17.683 ; -15.775,-23.423 -10.47,-17.302 ; -15.648,-24.185 -10.343,-18.064 ; -15.648,-23.931 -10.343,-17.81 ; -15.648,-23.042 -10.343,-16.921 ; -15.594,-24.376 -10.343,-18.318 ; -15.576,-22.614 -10.271,-16.493 ; -15.521,-24.566 -10.216,-18.445 ; -15.394,-24.693 -10.089,-18.572 ; -15.267,-24.82 -9.962,-18.699 ; -15.14,-24.947 -9.835,-18.826 ; -15.013,-25.328 -9.708,-19.207 ; -15.013,-25.074 -9.708,-18.953 ; -14.877,-25.464 -9.454,-19.207 ; -13.866,-26.075 cw(c-13.134,-23.526) -14.937,-21.583 -12.572,-18.854 ccw(c-12.903,-18.392) -12.929,-17.824 ; -12.245,-22.696 ccw(c-11.947,-23.153) -11.842,-23.688 ; -10.338,-13.673 cw(c-10.102,-16.275) -7.676,-15.305
  lines w0.3: -21.546,-25.963 -19.21,-25.963 ; -1.785,-30.054 -1.785,-10.054 ; -1.785,-25.054 58.215,-25.054 ; -1.785,-20.054 58.215,-20.054 ; -1.785,-15.054 58.215,-15.054 ; 18.215,-30.054 18.215,-15.054 ; -31.785,-30.054 -31.785,-10.054 58.215,-10.054 58.215,-30.054 -31.785,-30.054
  text "Project: '.Board_Name'" at 57.021,-13.27 h3
  text "Gerber:" at 17.032,-18.354 h3
  text "Layer:" at 57.02,-18.354 h3
  text "Ref: '.Board_Reference'" at 17.032,-23.354 h3
  text "Variant: '.VariantName'" at 57.021,-23.354 h3
  text "R" at -28.094,-25.836 h1.52
  text "Rev: '.Board_PCB_Revision'" at 17.089,-28.354 h3
  text "Date: '.Board_Document_Date'" at 57.021,-28.354 h3

## Dimensions
1.651,5.842 to 0,0 on M2-Board Dimensions
16.891,5.842 to 18.54,0 on M2-Board Dimensions
1.651,5.842 to 16.891,5.842 on M2-Board Dimensions
0,0 to 1.651,5.842 on M2-Board Dimensions
0,50.29 to 18.54,50.29 on M2-Board Dimensions
0,0 to 0.03,50.3 on M2-Board Dimensions

## Text inside footprints (layer, text, board x,y; h text height)
CN1: M14-Top Assembly "5" at 7.5,45.86 h0.75; M14-Top Assembly "1" at 10.07,45.86 h0.75; Top Overlay "1" at 13.4,45.67 h1.02; M7-Top Info "PCB" at 2.87,50.46 h1; M7-Top Info "EDGE" at 13.34,50.44 h1
CN3: M15-Bottom Assembly "1" at 1.8,42.02 h0.75; M15-Bottom Assembly "15" at 2,4.85 h0.75
CN4: M15-Bottom Assembly "1" at 16.97,42.02 h0.75; M15-Bottom Assembly "15" at 17.209,4.85 h0.75
D1: M14-Top Assembly "K" at 14.14,32.99 h0.75 r270
D2: M15-Bottom Assembly "K" at 11.92,40.53 h0.75 r90
D3: M15-Bottom Assembly "K" at 14.8,25.06 h0.75 r90
D4: M15-Bottom Assembly "K" at 12.99,25.02 h0.75 r90
D5: M15-Bottom Assembly "A" at 4.75,5.075 h1; M15-Bottom Assembly "K" at 8.4,5.075 h1; Bottom Overlay "K" at 9.4,6.4 h1.2
LD1: M14-Top Assembly "G" at 0.71,46.37 h0.75; M14-Top Assembly "A2" at 0.32,47.81 h0.75; M14-Top Assembly "A1" at 1.93,44.95 h0.75; M14-Top Assembly "C1" at 1.89,47.79 h0.75; M14-Top Assembly "C2" at 0.32,44.93 h0.75; M14-Top Assembly "R" at 2.26,46.39 h0.75; Top Overlay "G" at 0.87,46.38 h1.02; Top Overlay "R" at 2.12,46.42 h1.02
LD2: M14-Top Assembly "K" at 4.169,1.562 h0.75 r270
LD3: M14-Top Assembly "K" at 14.126,1.562 h0.75 r270
LD4: M14-Top Assembly "K" at 6.65,44.1 h0.75
U1: Top Overlay "1" at 9.75,24.41 h1.02
U2: M14-Top Assembly "32" at 3.7,15.64 h0.75; M14-Top Assembly "25" at 3.7,21.219 h0.75; M14-Top Assembly "24" at 5.46,22.54 h0.75; M14-Top Assembly "17" at 12.56,22.51 h0.75; M14-Top Assembly "16" at 14.34,21.23 h0.75; M14-Top Assembly "9" at 14.36,15.65 h0.75; M14-Top Assembly "8" at 12.59,14.16 h0.75; M14-Top Assembly "1" at 5.95,14.16 h0.75; M14-Top Assembly "1" at 7.547,16.194 h0.5; M14-Top Assembly "8" at 10.997,16.194 h0.5; M14-Top Assembly "9" at 11.797,16.819 h0.5 r90; M14-Top Assembly "16" at 11.797,20.244 h0.5 r90; M14-Top Assembly "17" at 10.897,20.819 h0.5; M14-Top Assembly "24" at 7.372,20.844 h0.5; M14-Top Assembly "25" at 6.897,20.669 h0.5 r270; M14-Top Assembly "32" at 6.897,17.144 h0.5 r270; M14-Top Assembly "33" at 9.072,18.519 h0.5; Top Overlay "1" at 5.2,13.88 h1.5; Top Overlay "1" at 6.79,15.7 h1.5 r270
U3: Top Overlay "1" at 12.25,6.74 h1.02
U4: M14-Top Assembly "K" at 6.125,4.45 h0.45
U5: Bottom Overlay "1" at 10.78,46.16 h1.02
U6: M15-Bottom Assembly "1" at 9.95,42.075 h0.5; M15-Bottom Assembly "2" at 9.5,42.075 h0.5; M15-Bottom Assembly "3" at 9,42.075 h0.5; M15-Bottom Assembly "4" at 9,44.225 h0.5; M15-Bottom Assembly "5" at 9.5,44.225 h0.5; M15-Bottom Assembly "6" at 10,44.225 h0.5; Bottom Overlay "1" at 10.45,41.9 h1.02
U7: M15-Bottom Assembly "1" at 12.56,29.16 h0.75; Bottom Overlay "1" at 12.67,29.08 h1.02
U8: M15-Bottom Assembly "3" at 13.12,14.37 h0.75; M15-Bottom Assembly "2" at 10.8,14.3 h0.75; M15-Bottom Assembly "1" at 8.44,14.33 h0.75; M15-Bottom Assembly "4" at 10.79,8.4 h0.75; Bottom Overlay "1" at 7.35,14.27 h1.02